# Altium PCB Control_CPUBoard_PCB.PcbDoc (part 1 of 2)
Units mm, origin at the board's own origin, x right, y up, seen from the top; angles counter-clockwise.
Board outline 140 x 120 mm, 2 copper layers (Top Layer, Bottom Layer); 146 components, 135 nets, 512 pads, 156 vias.
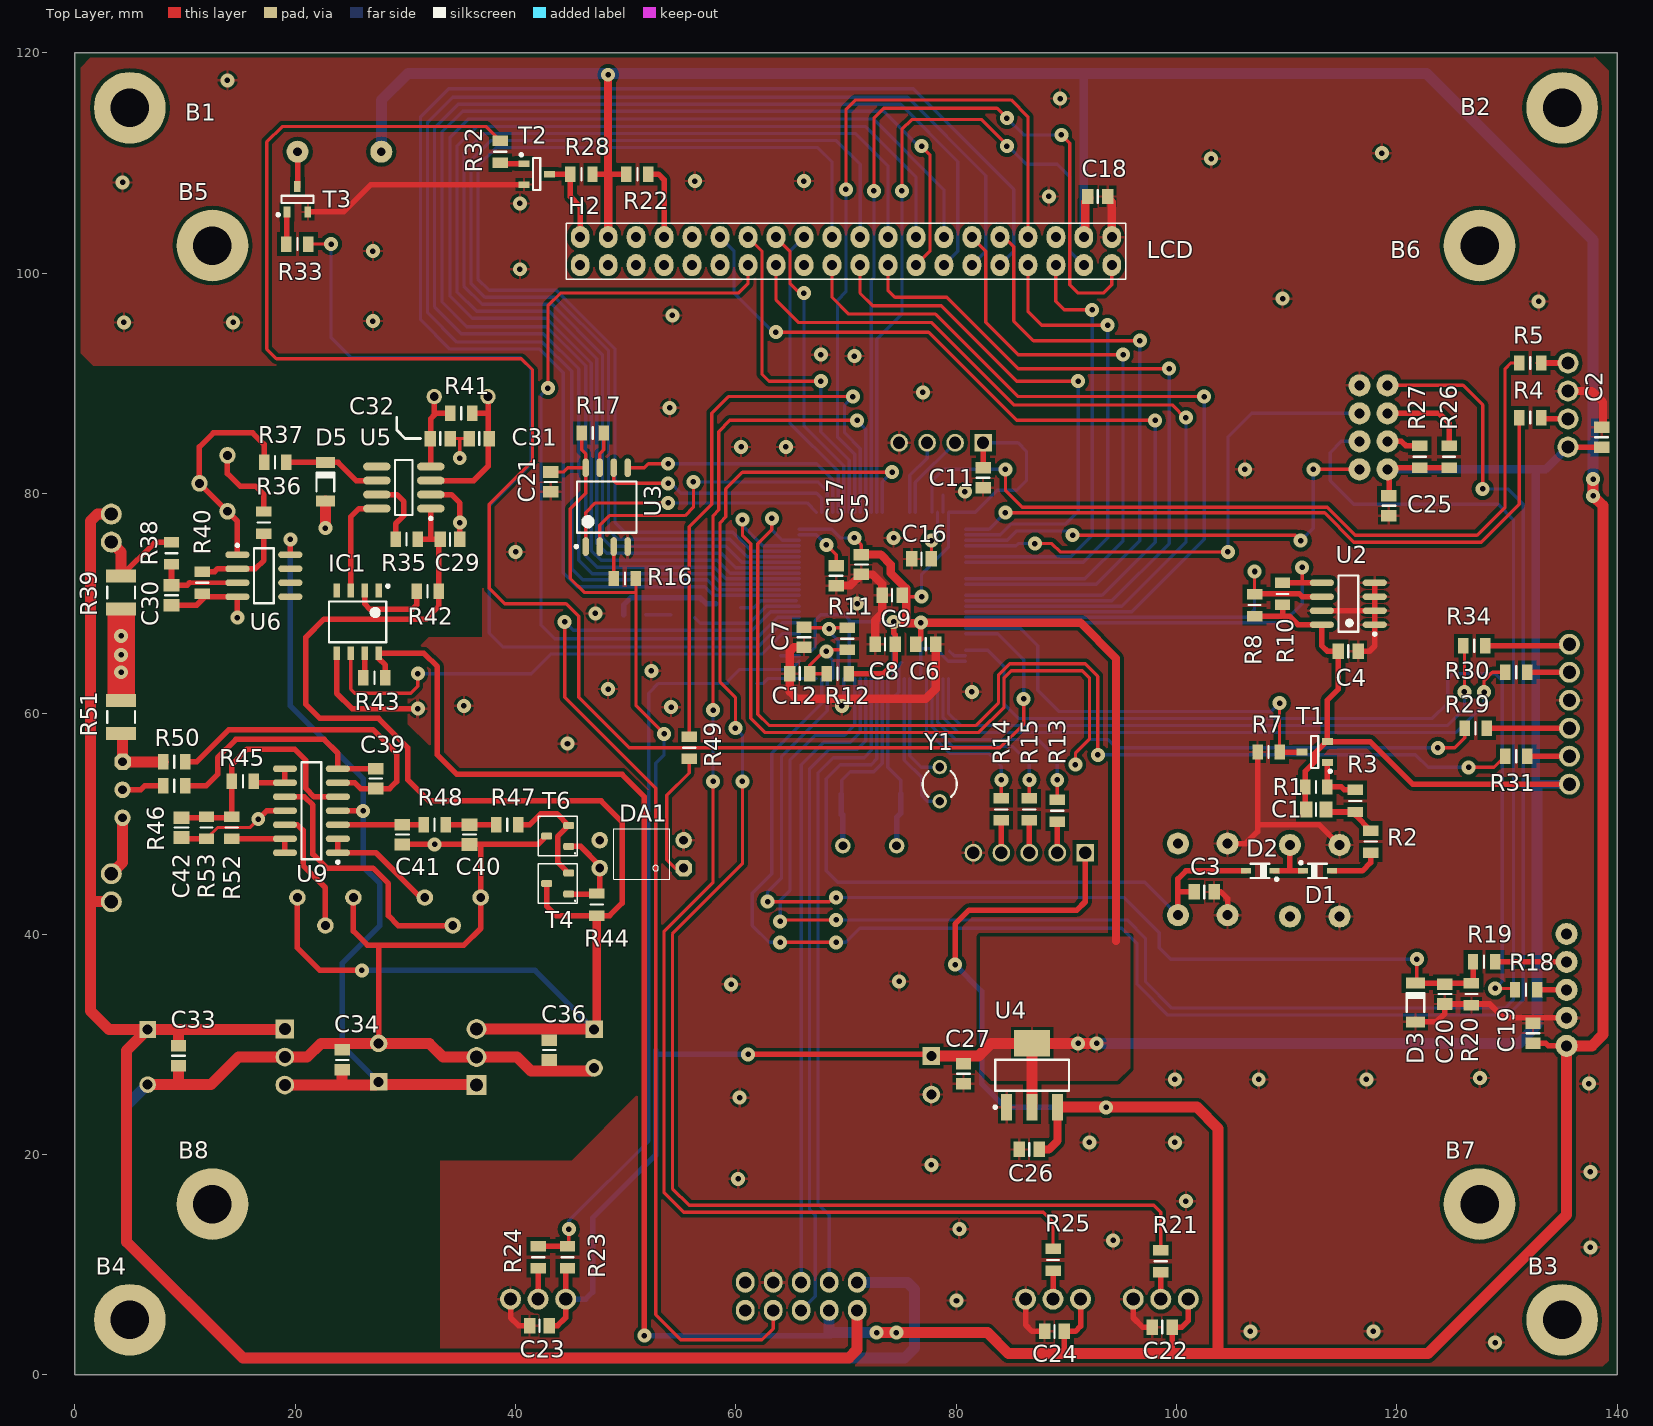
[diagram p0: Top Layer view]
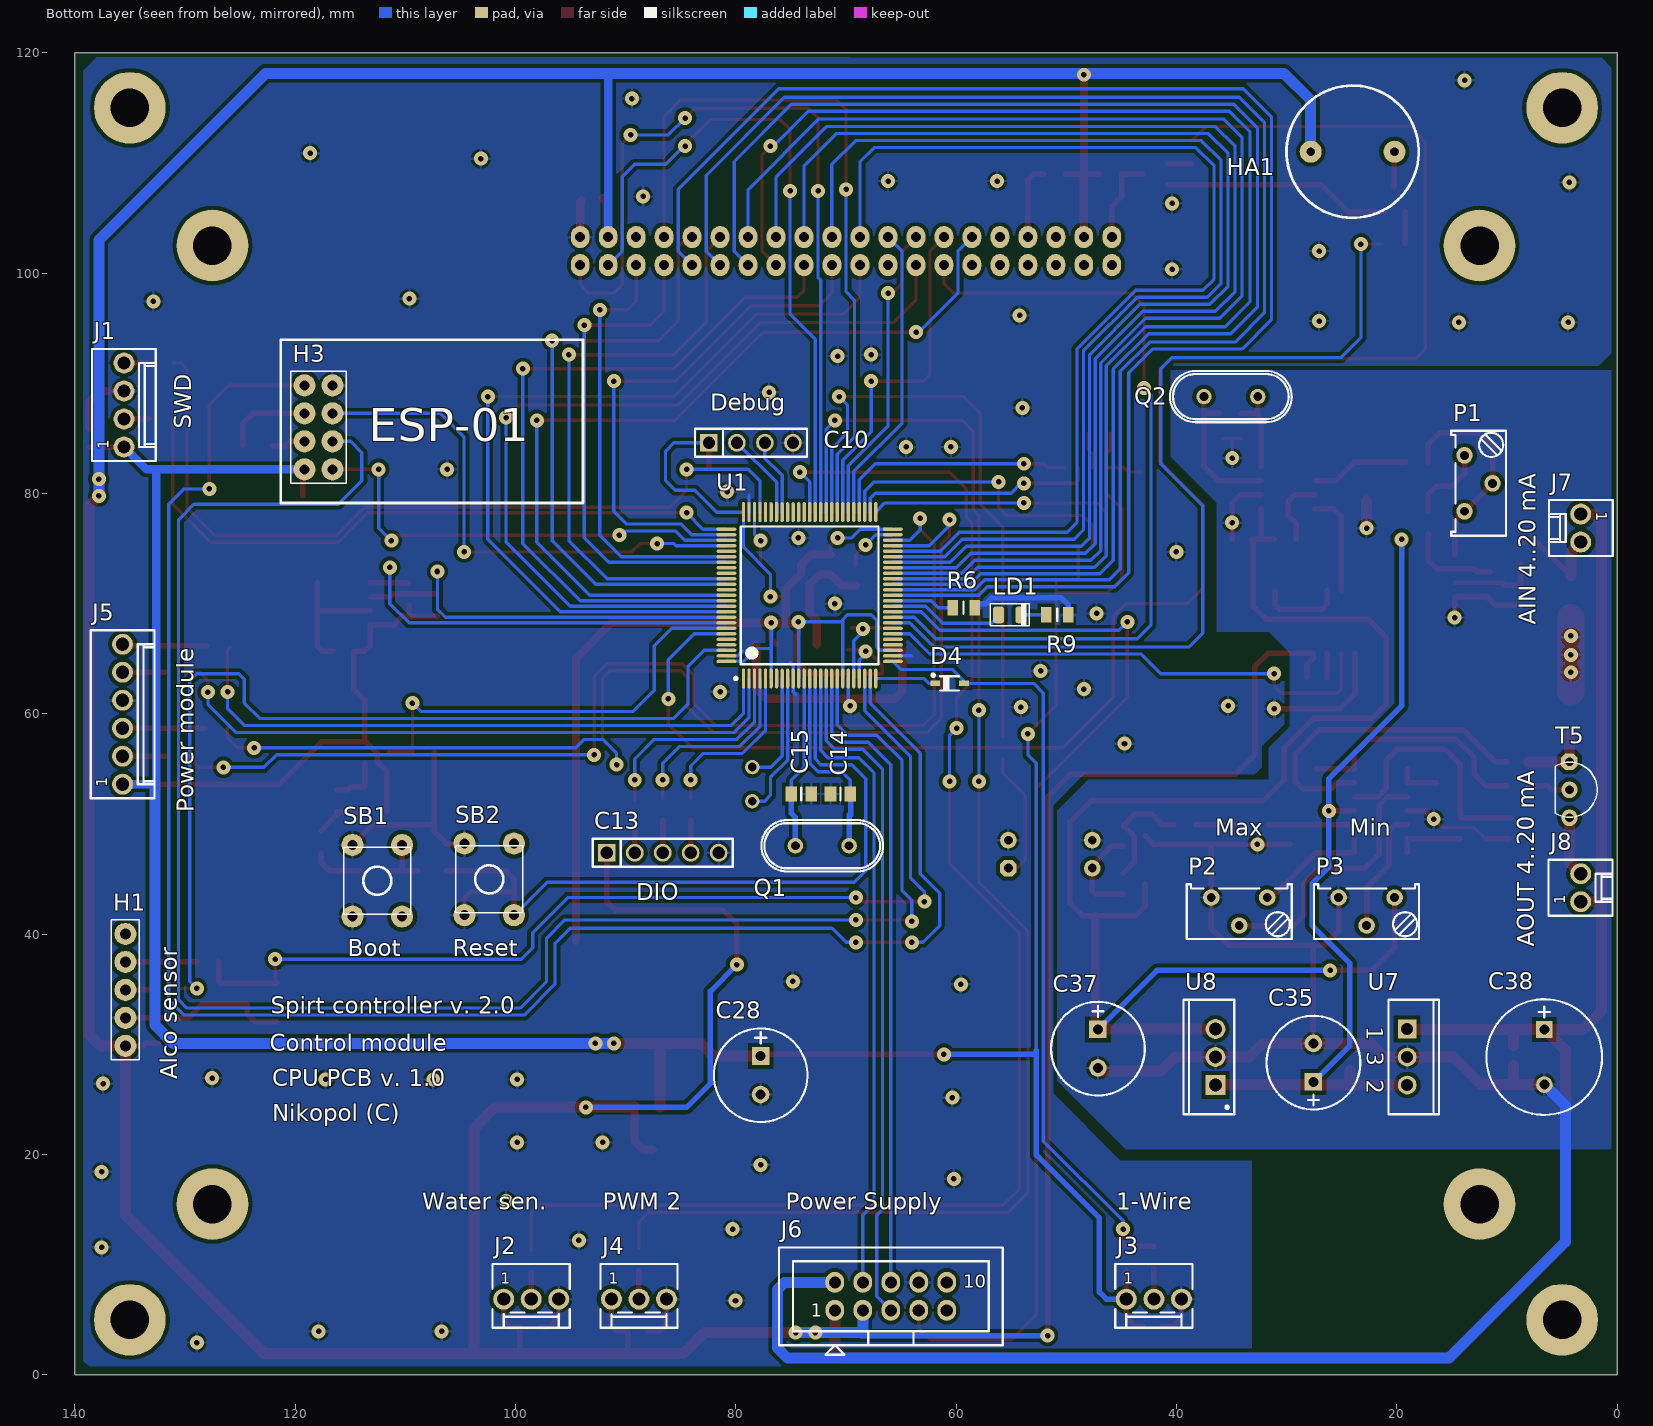
[diagram p1: Bottom Layer view, seen from below]
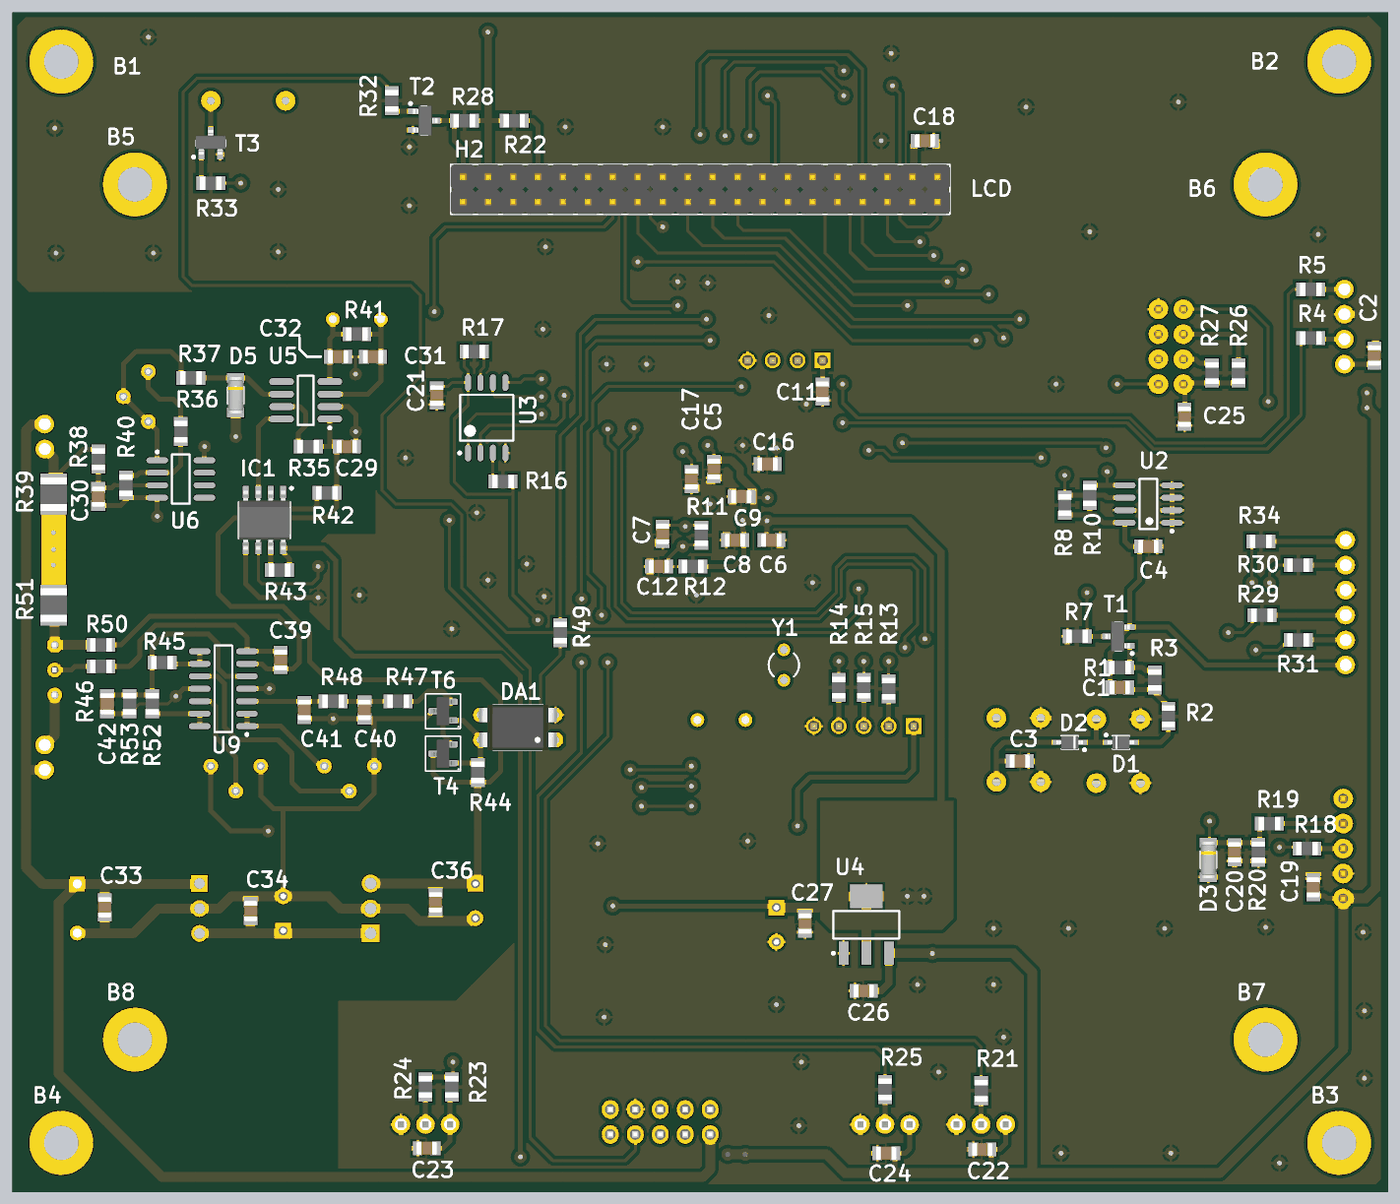
[diagram p3: 3D render of the assembled board from above, using the file's embedded part models]
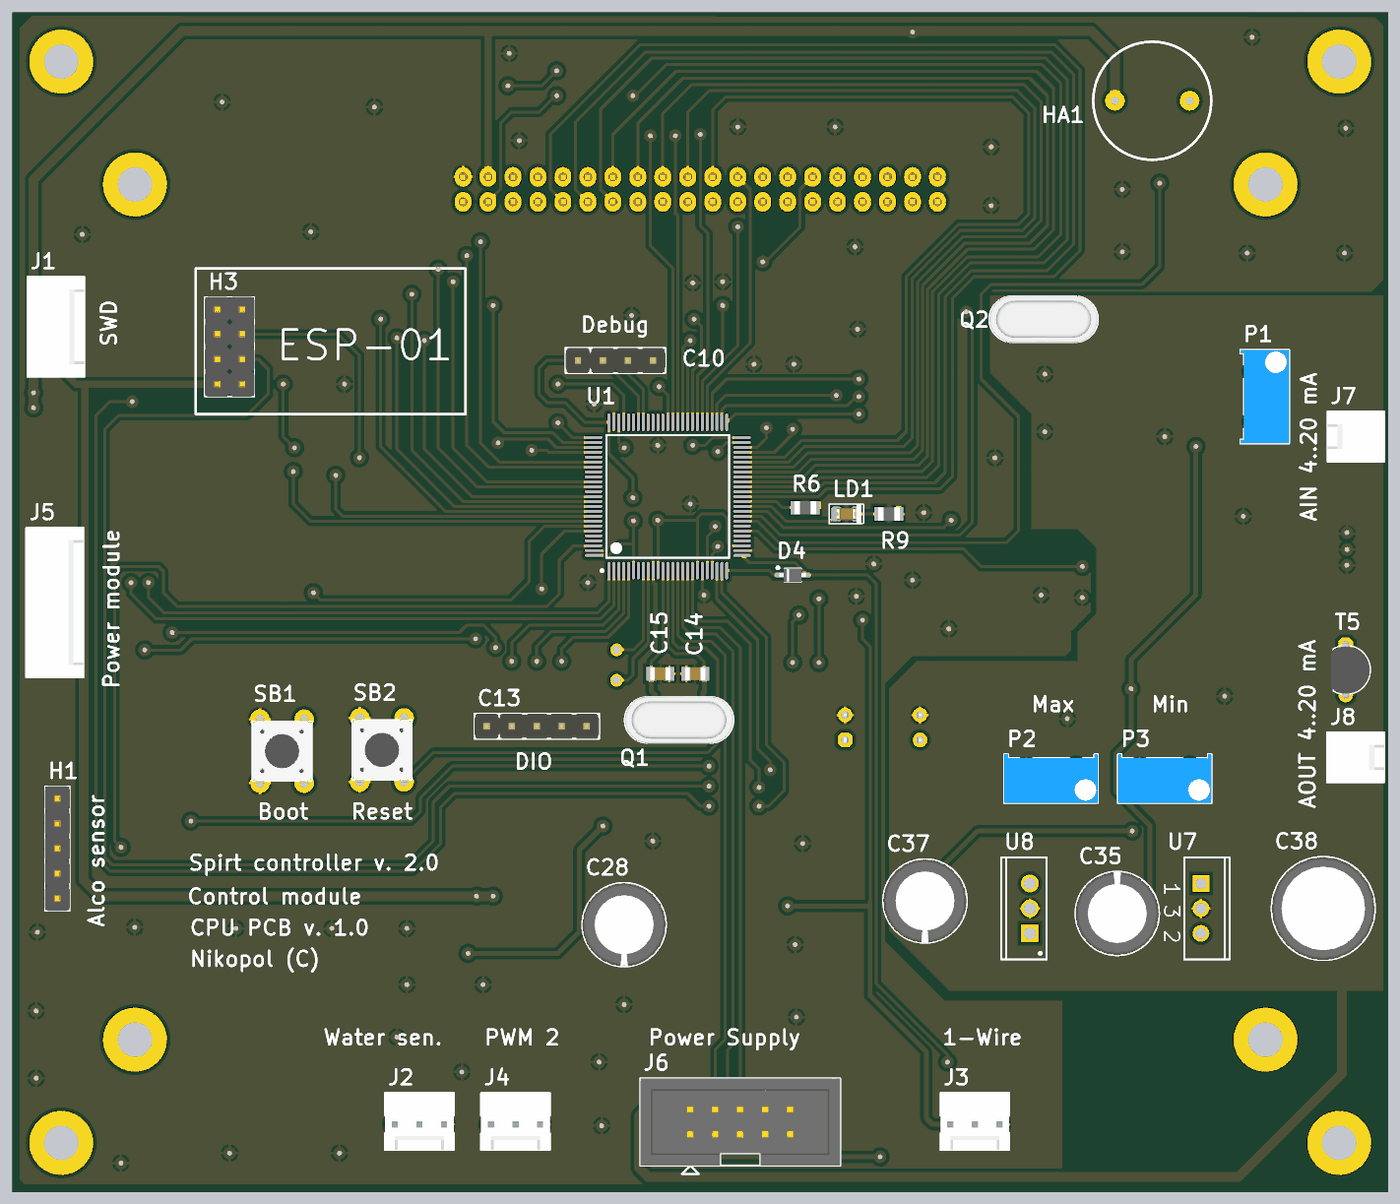
[diagram p4: 3D render of the assembled board from below, using the file's embedded part models]

## Layer stack, top to bottom
Top Solder: solder mask 0.0102, Solder Resist, Dk 3.5
Top Layer: signal copper 0.0356
Dielectric 1: dielectric 0.32, FR-4, Dk 4.8
Bottom Layer: signal copper 0.0356
Bottom Solder: solder mask 0.0102, Solder Resist, Dk 3.5

## Board outline
0,0 140,0 140,120 0,120

## Design rules (kind name [scope] priority, off if disabled: settings)
Clearance Clearance_1 [(InNamedPolygon('Bottom Layer- GND')) or (InNamedPolygon('Top Layer- GND'))] p1: gap=0.35
Clearance Clearance_2 [(InNamedPolygon('Bottom Layer- GND2'))] p2: gap=0.35
Clearance [All] p3: gap=0.125
HoleSize [All] p1: absolutevalues=TRUE maxlimit=10 minlimit=0.025 maxpercent=80.000 minpercent=20.000
PolygonConnect [All] p1: connectstyle=Relief reliefconductorwidth=0.254 reliefentries=4 polygonreliefangle="90 Angle" airgapwidth=0.254
RoutingVias [All] p1: holewidth=0.5 width=1.27 viastyle="Through Hole" minholewidth=0.5 minwidth=1.27 maxholewidth=0.711 maxwidth=2
SilkToSilkClearance [All] p1: silktosilkclearance=0.05
SilkToSolderMaskClearance [IsPad] p1: minsilkscreentomaskgap=0 clearancetoexposedcopper=TRUE
SolderMaskExpansion [All] p1: expansion=0.102
UnpouredPolygon [All] p1: allowunpoured=FALSE
Width [All] p1: maxlimit=5 minlimit=0.254 preferedwidth=0.5
26 further rules are at their usual default settings.

## Classes and differential pairs
component class CPUBoard_p1: C1 C2 C3 C4 C5 C6 C7 C8 C9 C10 C11 C12 C13 C14 C15 C16 C17 D1 D2 J1 LD1 Q1 R1 R2 R3 R4 R5 R6 R7 R8 R9 R10 R11 R12 R13 R14 R15 SB1 SB2 T1 U1 U2 Y1
component class CPUBoard_p2: B1 B2 B3 B4 B5 B6 B7 B8 C18 C19 C20 C21 C22 C23 C24 C25 C26 C27 C28 D3 D4 H1 H2 H3 HA1 J2 J3 J4 J5 J6 R16 R17 R18 R19 R20 R21 R22 R23 R24 R25 R26 R27 R28 R29 R30 R31 R32 R33 R34 T2 T3 U3 U4
component class CPUBoard_p3: C29 C30 C31 C32 C33 C34 C35 C36 C37 C38 C39 C40 C41 C42 D5 DA1 IC1 J7 J8 P1 P2 P3 Q2 R35 R36 R37 R38 R39 R40 R41 R42 R43 R44 R45 R46 R47 R48 R49 R50 R51 R52 R53 T4 T5 T6 U5 U6 U7 U8 U9

## Components (designator, comment, footprint, x,y, rotation, side; value= is the part's Value field where it differs from the comment)
B1 "Plated Hole" MTG350_650 5,115 r0 top
B2 "Plated Hole" MTG350_650 135,115 r0 top
B3 "Plated Hole" MTG350_650 135,5 r0 top
B4 "Plated Hole" MTG350_650 5,5 r0 top
B5 "Plated Hole" MTG350_650 12.5,102.5 r0 top
B6 "Plated Hole" MTG350_650 127.5,102.5 r0 top
B7 "Plated Hole" MTG350_650 127.5,15.5 r0 top
B8 "Plated Hole" MTG350_650 12.5,15.5 r0 top
C1 "1uF" CAPC2012X140N 112.668,51.327 r180 top
C2 "100nF" CAPC2012X135N 138.576,85.109 r270 top
C3 "100nF" CAPC2012X135N 102.508,43.834 r180 top
C4 "100nF" CAPC2012X135N 115.589,65.678 r180 top
C5 "100nF" CAPC2012X135N 71.393,73.552 r90 top
C6 "100nF" CAPC2012X135N 77.235,66.313 r180 top
C7 "100nF" CAPC2012X135N 66.186,66.948 r90 top
C8 "100nF" CAPC2012X135N 73.552,66.313 r0 top
C9 "100nF" CAPC2012X135N 74.187,70.758 r0 top
C10 "WE-2.54 mm Pin Header & Jumper 61300411121" 61300411121 82.442,84.601 r180 bottom
C11 "100nF" CAPC2012X135N 82.442,81.426 r90 top
C12 "100nF" CAPC2012X135N 65.805,63.646 r0 top
C13 "WE-2.54 mm Pin Header & Jumper 61300511121" 61300511121 91.713,47.39 r180 bottom
C14 "22pF" CAPC2012X135N 70.504,52.724 r180 bottom
C15 "22pF" CAPC2012X135N 74.06,52.724 r0 bottom
C16 "100nF" CAPC2012X135N 76.854,74.06 r0 top
C17 "100nF" CAPC2012X135N 69.107,72.536 r90 top
C18 "100nF" CAPC2012X135N 92.856,106.953 r0 top
C19 "100nF" CAPC2012X135N 132.353,31.007 r90 top
C20 "10nF" CAPC2012X135N 124.352,34.563 r90 top
C21 "100nF" CAPC2012X135N 43.199,81.045 r270 top
C22 "100nF" CAPC2012X135N 98.698,4.337 r180 top
C23 "100nF" CAPC2012X135N 42.183,4.464 r180 top
C24 "100nF" CAPC2012X135N 88.919,3.956 r180 top
C25 "100nF" CAPC2012X135N 119.272,78.886 r270 top
C26 "100nF" CAPC2012X135N 86.633,20.466 r180 top
C27 "100nF" CAPC2012X135N 80.664,27.324 r270 top
C28 "220uF" CAPPR350-850X1300 77.743,27.197 r270 bottom
C29 "100nF" CAPC2012X135N 34.055,75.838 r0 top
C30 "470nF" CAPC2012X110N 8.782,70.758 r90 top
C31 "33pF" CAPC2012X135N 36.722,84.982 r0 top
C32 "33pF" CAPC2012X135N 33.166,84.982 r180 top
C33 "100nF" CAPC2012X135N 9.417,28.975 r270 top
C34 "100nF" CAPC2012X135N 24.276,28.594 r90 top
C35 "220uF" CAPPR350-850X1300 27.578,28.34 r90 bottom
C36 "100nF" CAPC2012X135N 43.072,29.483 r270 top
C37 "220uF" CAPPR350-850X1300 47.136,29.61 r270 bottom
C38 "100uF" CAPPR500-1050X1750 6.623,28.848 r270 bottom
C39 "4.7nF" CAPC2012X135N 27.324,54.121 r90 top
C40 "560nF" CAPC2012X110N 35.833,49.041 r90 top
C41 "100nF" CAPC2012X135N 29.737,49.041 r270 top
C42 "47nF" CAPC2013X100N 9.671,49.676 r90 top
D1 "BAS416" SOD2512X110N 112.795,45.739 r0 top
D2 "BAS416" SOD2512X110N 107.588,45.739 r180 top
D3 "BZV55-B3V6" DIOMELF3515N 121.685,33.801 r270 top
D4 "BAS416" SOD2512X110N 60.598,62.757 r180 bottom
D5 "BZV55-B2V7" DIOMELF3515N 22.752,81.045 r270 top
DA1 "LTV817" DIL4-300a 51.454,47.263 r90 top
H1 "H-1x5" J1x5 135.401,34.944 r90 bottom
H2 "H-2x20" J2x20 70,102 r180 top
H3 "H-2x4" J2x4 117.748,85.871 r270 bottom
HA1 "HCM1205X" HCM1205X 24.022,111.017 r180 bottom
IC1 "HCPL-0601-000E" SOIC127P600X330-8N 25.673,68.345 r270 top
J1 "KK®" MOLEX_22-27-2041 135.528,88.03 r90 bottom
J2 "KK®" MOLEX_22-04-1031 98.571,6.877 r180 bottom
J3 "KK®" MOLEX_22-04-1031 42.056,6.877 r180 bottom
J4 "KK®" MOLEX_22-04-1031 88.792,6.877 r180 bottom
J5 "KK®" MOLEX_22-27-2061 135.655,59.963 r90 bottom
J6 "C-Grid®" MOLEX_70246-1004 65.932,7.131 r180 bottom
J7 "KK®" MOLEX_22-27-2021 3.321,76.854 r270 bottom
J8 "KK®" MOLEX_22-27-2021 3.321,44.215 r90 bottom
LD1 "Led" "Led 0805-Red" 55.137,68.98 r180 bottom
P1 "50k" TRIM_BOURNS_3296Y 12.592,80.918 r270 bottom
P2 "10k" TRIM_BOURNS_3296Y 34.309,42.056 r0 bottom
P3 "10k" TRIM_BOURNS_3296Y 22.752,42.056 r0 bottom
Q1 "8MHz" XTAL_HC-49/U-S 72.155,48.025 r0 bottom
Q2 "2MHz" XTAL_HC-49/U-S 35.071,88.792 r180 bottom
R1 "47k" RESC2012X60N 112.668,53.359 r180 top
R2 "100" RESC2012X60N 117.621,48.406 r90 top
R3 "47k" RESC2012X60N 116.224,52.089 r90 top
R4 "22" RESC2012X60N 132.099,86.887 r0 top
R5 "22" RESC2012X60N 132.099,91.84 r0 top
R6 "0" RESC2012X60N 59.328,69.615 r180 bottom
R7 "4k7" RESC2012X60N 108.35,56.534 r0 top
R8 "4k7" RESC2012X60N 107.08,69.869 r270 top
R9 "5k6" RESC2012X60N 50.819,68.98 r0 bottom
R10 "4k7" RESC2012X60N 109.62,70.885 r270 top
R11 "0" RESC2012X60N 70.123,66.821 r270 top
R12 "0" RESC2012X60N 69.234,63.646 r0 top
R13 "22" RESC2012X60N 89.173,51.2 r90 top
R14 "22" RESC2012X60N 84.093,51.327 r90 top
R15 "22" RESC2012X60N 86.633,51.327 r90 top
R16 "4k7" RESC2012X60N 49.93,72.282 r0 top
R17 "4k7" RESC2012X60N 47.009,85.49 r180 top
R18 "220" RESC2012X60N 131.718,34.944 r0 top
R19 "1k2" RESC2012X60N 127.908,37.484 r0 top
R20 "2k32" RESC2012X60N 126.765,34.563 r90 top
R21 "220" RESC2012X60N 98.571,10.306 r270 top
R22 "10k" RESC2012X60N 51.073,108.985 r0 top
R23 "4k7" RESC2012X60N 44.723,10.687 r270 top
R24 "220" RESC2012X60N 42.056,10.687 r270 top
R25 "220" RESC2012X60N 88.792,10.433 r270 top
R26 "4k7" RESC2012X60N 124.733,83.331 r270 top
R27 "4k7" RESC2012X60N 122.066,83.331 r270 top
R28 "100k" RESC2012X60N 45.993,108.985 r0 top
R29 "22" RESC2012X60N 130.829,56.153 r0 top
R30 "22" RESC2012X60N 130.829,63.773 r0 top
R31 "22" RESC2012X60N 127.146,58.693 r0 top
R32 "10k" RESC2012X60N 38.627,111.017 r270 top
R33 "10k" RESC2012X60N 20.212,102.635 r180 top
R34 "22" RESC2012X60N 127.019,66.186 r0 top
R35 "10k" RESC2012X60N 30.118,75.838 r0 top
R36 "1k3" RESC2012X60N 17.164,77.362 r270 top
R37 "100" RESC2012X60N 18.18,82.823 r0 top
R38 "5k6" RESC2012X60N 8.782,74.568 r270 top
R39 "1" RESC3225X70N 4.21,71.012 r90 top
R40 "120k" RESC2012X60N 11.576,71.901 r90 top
R41 "1M" RESC2012X60N 35.071,87.268 r180 top
R42 "470" RESC2012X60N 32.023,71.139 r0 top
R43 "10k" RESC2012X60N 27.197,63.265 r0 top
R44 "4k7" RESC2012X60N 47.39,42.691 r270 top
R45 "22k" RESC2012X60N 15.259,53.867 r180 top
R46 "22k" RESC2012X60N 9.036,53.486 r180 top
R47 "13k" RESC2012X60N 39.262,49.93 r180 top
R48 "1k" RESC2012X60N 32.658,49.93 r180 top
R49 "220" RESC2012X60N 55.772,56.915 r270 top
R50 "1k" RESC2012X60N 9.036,55.645 r180 top
R51 "100" RESC3225X70N 4.21,59.709 r270 top
R52 "22k" RESC2012X60N 14.243,49.676 r90 top
R53 "2k2" RESC2012X60N 11.957,49.676 r90 top
SB1 "TS-06" TS-06 112.541,44.85 r180 bottom
SB2 "TS-06" TS-06 102.381,44.977 r180 bottom
T1 "BC857B" SOT95P230X110-3N 112.541,56.534 r180 top
T2 "BC847B" SOT95P230X110-3N 41.929,108.985 r0 top
T3 "BC847B" SOT95P230X110-3N 20.212,106.699 r90 top
T4 "BC817-16" SOT23 43.834,44.596 r90 top
T5 "2N5551" TO92C1 4.337,53.105 r270 bottom
T6 "BC857A" SOT23 43.834,48.914 r90 top
U1 "STM32F407VGT6" STM-LQFP100_N 73.298,70.758 r90 bottom
U2 "AT24C08BN-SP25-B" 8S1_N 115.589,69.996 r180 top
U3 "SST25VF016B-75-4I-S2AF" MCHP-SOIC-S2A8_N 48.279,78.759 r90 top
U4 "LD1117AS12TR" SOT-223_N 86.887,27.197 r90 top
U5 "AD7741-ARZ" "SOIC8 8S1_M" 29.864,80.537 r180 top
U6 "LM358AD" SO8_N 17.164,72.536 r0 top
U7 "L7812ACV" TO220ABN 19.069,28.848 r270 bottom
U8 "L7805ACP" TO220FP 36.468,28.848 r90 bottom
U9 "LM324AD" SO14_N 21.482,51.2 r180 top
Y1 "XTAL" R38 78.505,53.613 r180 top

## Footprints (in the part's own frame and the unit in brackets; to place one, negate y for a bottom-side part, rotate by r counter-clockwise, add the part's x,y. Pads: shape width x height; smd on the part's side, far side on the other; paste and mask are expansions set on the pad)
8S1_N [mm] "SOIC, 8-Leads, Body 4.9x3.9mm, Pitch 1.27mm, IPC Medium Density"
  oval 2.2x0.6 smd: 1(-2.4,1.905) 2(-2.4,0.635) 3(-2.4,-0.635) 4(-2.4,-1.905) 5(2.4,-1.905) 6(2.4,-0.635) 7(2.4,0.635) 8(2.4,1.905)
  silkscreen extent -2.53,-2.55 0.9,2.88, body extent -1.99,-2.52 1.99,2.52, height 1.75
61300411121 [mm] "4 pins, 1 row, straight, gold plating"
  rect 1.6x1.6 hole 1.1: 1(0,0)
  round 1.6 hole 1.1: 2(2.54,0) 3(5.08,0) 4(7.62,0)
  silkscreen extent -1.27,-1.27 8.89,1.27, body extent -1.27,-1.27 8.89,1.27, height 8.54
61300511121 [mm] "5 pins, 1 row, straight, gold plating"
  rect 1.6x1.6 hole 1.1: 1(0,0)
  round 1.6 hole 1.1: 2(2.54,0) 3(5.08,0) 4(7.62,0) 5(10.16,0)
  silkscreen extent -1.27,-1.27 11.43,1.27, body extent -1.27,-1.27 11.43,1.27, height 8.54
CAPC2012X110N [mm] "Chip Capacitor, Body 2.0x1.25mm, IPC Medium Density"
  rect 1.15x1.45 smd: 1(-0.9,0) 2(0.9,0)
  silkscreen extent 0,-0.58 0,0.58, body extent -1.05,-0.67 1.05,0.68, height 1.1
CAPC2012X135N [mm] "Chip Capacitor, Body 2.0x1.25mm, IPC Medium Density"
  rect 1.05x1.4 smd: 1(-0.9,0) 2(0.9,0)
  silkscreen extent 0,-0.58 0,0.58, body extent -1.05,-0.67 1.05,0.68, height 1.25
CAPC2012X140N [mm] "Chip Capacitor, Body 2.0x1.25mm, IPC Medium Density"
  rect 1.15x1.45 smd: 1(-0.9,0) 2(0.9,0)
  silkscreen extent 0,-0.58 0,0.58, body extent -1.05,-0.67 1.05,0.68, height 1.3
CAPC2013X100N [mm] "Capacitor, Non-Polarized, Chip; 2.00mm L X 1.25mm W X 0.9mm H, IPC Medium Density"
  rect 1.15x1.45 smd: 1(-0.9,0) 2(0.9,0)
  silkscreen extent 0,-0.63 0,0.63, body extent -1.1,-0.72 1.1,0.73, height 1
CAPPR350-850X1300 [mm] "Capacitor, Radial, Pin spacing 3.5mm - Body Diameter 8.5mm x Body Height 13mm"
  rect 1.6x1.6 hole 0.9: 1(-1.75,0)
  round 1.6 hole 0.9: 2(1.75,0)
  silkscreen extent -4.25,-4.25 4.25,4.25, body extent -4.25,-4.25 4.25,4.25, height 13
CAPPR500-1050X1750 [mm] "Capacitor, Radial, Pin spacing 5.0mm - Body Diameter 10.5mm X Body Height 17.5mm"
  rect 1.5x1.5 hole 0.9: 1(-2.5,0)
  round 1.5 hole 0.9: 2(2.5,0)
  silkscreen extent -5.25,-5.25 5.25,5.25, body extent -5.25,-5.25 5.25,5.25, height 17.5
DIL4-300a [mm]
  oct 1.5x1.5 hole 0.8: 1(-1.27,-3.81)
  round 1.5 hole 0.8: 2(1.27,-3.81) 3(1.27,3.81) 4(-1.27,3.81)
  silkscreen extent -2.29,-2.54 2.29,2.54, body extent -2.29,-3.96 2.29,3.96, height 4.25
DIOMELF3515N [mm] "SOD80C, MELF Diode, 2-Leads, Body 3.5x1.5mm, IPC Medium Density"
  rect 1x1.75 smd: 1(-1.75,0) 2(1.75,0)
  silkscreen extent -0.85,-0.8 0.85,0.8, body extent -1.85,-0.8 1.85,0.8, height 1.6
HCM1205X [mm]
  round 2 hole 0.8: 1(-3.8,0) 2(3.8,0)
  silkscreen extent -6,-6 6,6, body extent -6,-6 6,6, height 10
J1x5 [mm]
  round 2 hole 1: 1(-5.08,0) 2(-2.54,0) 3(0,0) 4(2.54,0) 5(5.08,0)
  silkscreen extent -6.35,-1.27 6.35,1.27, body extent -6.35,-1.27 6.35,1.27, height 10.1
J2x4 [mm]
  round 2 hole 0.9: 1(-3.937,-1.397) 2(-3.937,1.143) 3(-1.397,-1.397) 4(-1.397,1.143) 5(1.143,-1.397) 6(1.143,1.143) 7(3.683,-1.397) 8(3.683,1.143)
  silkscreen extent -5.21,-2.67 4.95,2.41, body extent -5.21,-2.67 4.95,2.41, height 10.1
J2x20 [mm]
  oval 1.7x2 hole 0.9 mask+0.102: 1(-24.13,-1.27) 2(-24.13,1.27) 3(-21.59,-1.27) 4(-21.59,1.27) 5(-19.05,-1.27) 6(-19.05,1.27) 7(-16.51,-1.27) 8(-16.51,1.27) 9(-13.97,-1.27) 10(-13.97,1.27) 11(-11.43,-1.27) 12(-11.43,1.27) 13(-8.89,-1.27) 14(-8.89,1.27) 15(-6.35,-1.27) 16(-6.35,1.27) 17(-3.81,-1.27) 18(-3.81,1.27) 19(-1.27,-1.27) 20(-1.27,1.27) 21(1.27,-1.27) 22(1.27,1.27) 23(3.81,-1.27) 24(3.81,1.27) 25(6.35,-1.27) 26(6.35,1.27) 27(8.89,-1.27) 28(8.89,1.27) 29(11.43,-1.27) 30(11.43,1.27) 31(13.97,-1.27) 32(13.97,1.27) 33(16.51,-1.27) 34(16.51,1.27) 35(19.05,-1.27) 36(19.05,1.27) 37(21.59,-1.27) 38(21.59,1.27) 39(24.13,-1.27) 40(24.13,1.27)
  silkscreen extent -25.4,-2.54 25.4,2.54, body extent -25.4,-2.54 25.4,2.54, height 10.1
"Led 0805-Red" [mil]
  rrect50% 40x60 smd: 1(-40,0) 2(40,0)
  silkscreen extent -69,-40 69,40, body extent -40,-25 40,25, height 43
MCHP-SOIC-S2A8_N [mm] "SOIC, 8-Leads, Body 5.275x5.275mm, Pitch 1.27mm, IPC Medium Density"
  oval 1.7x0.6 smd: 1(-3.575,1.905) 2(-3.575,0.635) 3(-3.575,-0.635) 4(-3.575,-1.905) 5(3.575,-1.905) 6(3.575,-0.635) 7(3.575,0.635) 8(3.575,1.905)
  silkscreen extent -3.7,-2.7 2.33,2.88, body extent -2.7,-2.7 2.7,2.7, height 2.16
MOLEX_22-04-1031 [mm] "2.5mm (.100\") Pitch KK® Header, Single Row, Vertical, 3 Circuits"
  round 1.9 hole 1.2: 1(-2.5,0) 2(0,0) 3(2.5,0)
  silkscreen extent -3.5,-2.6 3.5,3.2, body extent -3.5,-2.6 3.5,3.2, height 11.7
MOLEX_22-27-2021 [mm] "2.54mm (.100\") Pitch KK® Header, Single Row, Vertical, 2 Circuits"
  round 1.9 hole 1.2: 1(-1.27,0.002) 2(1.27,-0.002)
  silkscreen extent -2.54,-2.88 2.54,2.92, body extent -2.54,-2.88 2.54,2.92, height 11.7
MOLEX_22-27-2041 [mm] "2.54mm (.100\") Pitch KK® Header, Single Row, Vertical, 4 Circuits"
  round 1.9 hole 1.2: 1(-3.81,0) 2(-1.27,0) 3(1.27,0) 4(3.81,0)
  silkscreen extent -5.08,-2.88 5.08,2.92, body extent -5.08,-2.88 5.08,2.92, height 11.7
MOLEX_22-27-2061 [mm] "2.54mm (.100\") Pitch KK® Header, Single Row, Vertical, 6 Circuits"
  round 1.9 hole 1.2: 1(-6.35,0) 2(-3.81,0) 3(-1.27,0) 4(1.27,0) 5(3.81,0) 6(6.35,0)
  silkscreen extent -7.62,-2.9 7.62,2.9, body extent -7.62,-2.9 7.62,2.9, height 11.7
MOLEX_70246-1004 [mm] "2.54mm Pitch C-Grid® Header, Low Profile, Dual Row, Vertical, Shrouded Header"
  oval 1.7x1.9 hole 1.1: 1(-5.08,-1.27) 2(-5.08,1.27) 3(-2.54,-1.27) 4(-2.54,1.27) 5(0,-1.27) 6(0,1.27) 7(2.54,-1.27) 8(2.54,1.27) 9(5.08,-1.27) 10(5.08,1.27)
  silkscreen extent -10.16,-5.31 10.16,4.45, body extent -10.16,-4.44 10.16,4.45, height 9.27
MTG350_650 [mm] "Plated Through Hole: Hole Dia.=3.5mm Pad Dia.=6.5mm"
  round 6.5 hole 3.5: 1(0,0)
R38 [mm] "Crystal, Thru-Hole; 2 Leads; Body 3.1 x 8.2 mm (Dia.xH)"
  round 1.3 hole 0.8: 1(0,1.55) 2(0,-1.55)
  silkscreen extent -1.55,-1.19 1.55,1.17
RESC2012X60N [mm] "Chip Resistor, EIA 0805, Metric 2012, Body 2.0x1.2mm, IPC Medium Density"
  rect 0.95x1.4 smd: 1(-1,0) 2(1,0)
  silkscreen extent 0,-0.55 0,0.55, body extent -1.1,-0.67 1.1,0.68, height 0.6
RESC3225X70N [mm] "Chip Resistor, EIA 1210, Metric 3225, Body 3.2x2.5mm, IPC Medium Density"
  rect 1.15x2.7 smd: 1(-1.5,0) 2(1.5,0)
  silkscreen extent -0.55,-1.25 0.55,1.25, body extent -1.7,-1.35 1.7,1.35, height 0.7
SO8_N [mm] "SOIC, 8-Leads, Body 4.9x3.9mm, Pitch 1.27mm, IPC Medium Density"
  oval 2.2x0.6 smd: 1(-2.4,1.905) 2(-2.4,0.635) 3(-2.4,-0.635) 4(-2.4,-1.905) 5(2.4,-1.905) 6(2.4,-0.635) 7(2.4,0.635) 8(2.4,1.905)
  silkscreen extent -2.52,-2.5 0.9,2.88, body extent -1.95,-2.45 1.95,2.45, height 1.75
SO14_N [mm] "SOIC, 14-Leads, Body 8.7x3.9mm, Pitch 1.27mm, IPC Medium Density"
  oval 2.2x0.6 smd: 1(-2.4,3.81) 2(-2.4,2.54) 3(-2.4,1.27) 4(-2.4,0) 5(-2.4,-1.27) 6(-2.4,-2.54) 7(-2.4,-3.81) 8(2.4,-3.81) 9(2.4,-2.54) 10(2.4,-1.27) 11(2.4,0) 12(2.4,1.27) 13(2.4,2.54) 14(2.4,3.81)
  silkscreen extent -2.53,-4.4 0.9,4.78, body extent -1.95,-4.33 1.95,4.33, height 1.75
SOD2512X110N [mm] "Small Outline Diode Flat Lead (SOD-323), 1.70mm W X 1.25mm L X 1.10mm H body,  IPC Medium Density"
  rect 0.9x0.5 smd: 1(-1.3,0) 2(1.3,0)
  silkscreen extent -1.62,-0.65 0.85,0.87, body extent -1.35,-0.67 1.35,0.68, height 1.1
"SOIC8 8S1_M" [mm] "SOIC, 8-Leads, Body 4.9x3.9mm, Pitch 1.27mm, IPC Low Density"
  oval 2.5x0.7 smd: 1(-2.45,1.905) 2(-2.45,0.635) 3(-2.45,-0.635) 4(-2.45,-1.905) 5(2.45,-1.905) 6(2.45,-0.635) 7(2.45,0.635) 8(2.45,1.905)
  silkscreen extent -2.58,-2.5 0.8,2.93, body extent -2,-2.5 2,2.5, height 1.75
SOIC127P600X330-8N [mm] "SOIC, 1.27mm pitch;8  pin, 4.00mm W X 5.00mm L, IPC Medium Density"
  rect 1.25x0.6 smd: 1(-2.85,1.905) 2(-2.85,0.635) 3(-2.85,-0.635) 4(-2.85,-1.905) 5(2.85,-1.905) 6(2.85,-0.635) 7(2.85,0.635) 8(2.85,1.905)
  silkscreen extent -3.37,-2.6 1.85,2.88, body extent -3,-2.6 3,2.6, height 3.3
SOT23 [mm] "SOT-23; 3 Leads; Body 3.0 x 2.6 mm Pitch 0.95mm"
  rrect50% 0.65x1 smd: 1(-0.95,-1) 2(0.95,-1) 3(0,1)
  silkscreen extent -1.78,-1.78 1.78,1.78, body extent -1.46,-1.23 1.46,1.24, height 1
SOT95P230X110-3N [mm] "SOT23, 3 pin, Pitch 0.95mm - 1.3mm W X 2.9mm L X 1.1mm H, IPC Medium Density"
  rect 1x0.6 smd: 1(-1.15,0.95) 2(-1.15,-0.95) 3(1.15,0)
  silkscreen extent -1.53,-1.45 0.33,1.87, body extent -1.17,-1.5 1.33,1.5, height 1.1
SOT-223_N [mm] "SOT223, 4-Leads, Body 6.5x3.5mm, Pitch 2.3mm, Lead Span 7mm, IPC Medium Density"
  rect 2.4x1 smd: 1(-2.9,2.3) 2(-2.9,0) 3(-2.9,-2.3)
  rect 2.4x3.3 smd: 4(2.9,0)
  silkscreen extent -3.02,-3.35 1.4,3.47, body extent -1.85,-3.35 1.85,3.35, height 1.8
STM-LQFP100_N [mm] "Thin QFP, 100-Leads, Body 14x14mm, Pitch 0.5mm, IPC Medium Density"
  oval 1.8x0.3 smd: 1(-7.55,6) 2(-7.55,5.5) 3(-7.55,5) 4(-7.55,4.5) 5(-7.55,4) 6(-7.55,3.5) 7(-7.55,3) 8(-7.55,2.5) 9(-7.55,2) 10(-7.55,1.5) 11(-7.55,1) 12(-7.55,0.5) 13(-7.55,0) 14(-7.55,-0.5) 15(-7.55,-1) 16(-7.55,-1.5) 17(-7.55,-2) 18(-7.55,-2.5) 19(-7.55,-3) 20(-7.55,-3.5) 21(-7.55,-4) 22(-7.55,-4.5) 23(-7.55,-5) 24(-7.55,-5.5) 25(-7.55,-6) 51(7.55,-6) 52(7.55,-5.5) 53(7.55,-5) 54(7.55,-4.5) 55(7.55,-4) 56(7.55,-3.5) 57(7.55,-3) 58(7.55,-2.5) 59(7.55,-2) 60(7.55,-1.5) 61(7.55,-1) 62(7.55,-0.5) 63(7.55,0) 64(7.55,0.5) 65(7.55,1) 66(7.55,1.5) 67(7.55,2) 68(7.55,2.5) 69(7.55,3) 70(7.55,3.5) 71(7.55,4) 72(7.55,4.5) 73(7.55,5) 74(7.55,5.5) 75(7.55,6)
  oval 0.3x1.8 smd: 26(-6,-7.55) 27(-5.5,-7.55) 28(-5,-7.55) 29(-4.5,-7.55) 30(-4,-7.55) 31(-3.5,-7.55) 32(-3,-7.55) 33(-2.5,-7.55) 34(-2,-7.55) 35(-1.5,-7.55) 36(-1,-7.55) 37(-0.5,-7.55) 38(0,-7.55) 39(0.5,-7.55) 40(1,-7.55) 41(1.5,-7.55) 42(2,-7.55) 43(2.5,-7.55) 44(3,-7.55) 45(3.5,-7.55) 46(4,-7.55) 47(4.5,-7.55) 48(5,-7.55) 49(5.5,-7.55) 50(6,-7.55) 76(6,7.55) 77(5.5,7.55) 78(5,7.55) 79(4.5,7.55) 80(4,7.55) 81(3.5,7.55) 82(3,7.55) 83(2.5,7.55) 84(2,7.55) 85(1.5,7.55) 86(1,7.55) 87(0.5,7.55) 88(0,7.55) 89(-0.5,7.55) 90(-1,7.55) 91(-1.5,7.55) 92(-2,7.55) 93(-2.5,7.55) 94(-3,7.55) 95(-3.5,7.55) 96(-4,7.55) 97(-4.5,7.55) 98(-5,7.55) 99(-5.5,7.55) 100(-6,7.55)
  silkscreen extent -7.67,-6.25 6.25,6.83, body extent -7,-7 7,7, height 1.6
TO92C1 [mm]
  round 1.5 hole 0.8: 1(2.54,0) 2(0,0)
  oct 1.5x1.5 hole 0.8: 3(-2.54,0)
  silkscreen extent -2.51,-1.27 2.49,2.51, body extent -2.79,-1.52 2.79,2.41, height 8
TO220ABN [mm] "TO, Thru-Hole, Vertical, Heatsink Mounted; 3 In-Line Leads; Pitch 2.54 mm; Pin sequence 1, 3, 2"
  rect 1.7x1.7 hole 1.1: 1(-2.54,0)
  round 1.7 hole 1.1: 2(2.54,0) 3(0,0)
  silkscreen extent -5.2,-1.7 5.2,2.9
TO220FP [mm] "TO, Thru-Hole, Vertical, Heatsink Mounted; 3 In-Line Leads; Pitch 2.54 mm"
  rect 1.8x1.8 hole 1.2: 1(-2.54,0)
  round 1.8 hole 1.2: 2(0,0) 3(2.54,0)
  silkscreen extent -5.2,-1.7 5.2,2.9, body extent -5.25,-1.75 5.25,2.95, height 20
TRIM_BOURNS_3296Y [mm] "Trimming Potentiometer BOURNS 3296Y Series"
  round 1.5 hole 0.8: 1(-2.54,-1.27) 2(0,1.27) 3(2.54,-1.27)
  silkscreen extent -4.77,-2.48 4.77,2.49, body extent -4.76,-2.47 4.77,2.49, height 11.49
TS-06 [mm]
  round 2 hole 0.9: 1(-2.25,-3.25) 1(-2.25,3.25) 2(2.25,-3.25) 2(2.25,3.25)
  silkscreen extent -3.05,-3.05 3.05,3.05, body extent -3,-3.3 3,3.3, height 3.95
XTAL_HC-49/U-S [mm] "HC-49/U-S Leaded Cristal, Body 11.5x4.66mm; Pitch 4.88mm"
  round 1.4 hole 0.8: 1(-2.44,0) 2(2.44,0)
  silkscreen extent -5.53,-2.33 5.53,2.33, body extent -5.52,-2.4 5.53,2.4, height 13.6

## Part data
B1 B2 B3 B4 B5 B6 B7 B8: library part PLATED_HOLE3.5_PAD6.5, "Single Terminal Socket"
C1: library part CC0805_1UF_35V_20%_X7R, "Non-polarised capacitor"
C2 C3 C4 C5 C6 C7 C8 C9 C11 C12 C16 C17 C18 C19 C21 C22 C23 C24 C25 C26 C27 C29 C33 C34 C36 C41: library part CC0805_100NF_50V_10%_X7R, "Non-polarised capacitor"
C10 C13: "WR-PHD 2.54mm Pin Header"
C14 C15: library part CC0805_22PF_50V_5%_NP0, "Non-polarised capacitor"
C20: library part CC0805_10NF_50V_5%_X7R, "Non-polarised capacitor"
C28 C35 C37: library part CAER_220UF_25V_20%_RUBYCON_25YXF220M8X11.5, "Polarised capacitor"
C30 C40: library part CC0805_470NF_50V_10%_X7R, "Non-polarised capacitor"
C31 C32: library part CC0805_33PF_50V_5%_NP0, "Non-polarised capacitor"
C38: library part CAER_100UF_63V_20%_500-1050X1750_LESR0R190, "Polarised capacitor"
C39: library part CC0805_4.7NF_50V_10%_X7R, "Non-polarised capacitor"
C42: library part CC0805_47NF_50V_10%_X7R, "Non-polarised capacitor"
D1 D2 D4: "Diode"
D3 D5: "Zener Diode"
IC1: "Single Optocoupler"
J1: library part MOLEX_22-27-2041, "Connector 4 Male"
J2 J3 J4: library part MOLEX_22-04-1031, "Connector 3 Male"
J5: library part MOLEX_22-27-2061, "Connector 6 Male"
J6: library part MOLEX_70246-1004, "Connector 10 Male"
J7 J8: library part MOLEX_22-27-2021, "Connector 2 Male"
LD1: library part "Led 0805 KP-2012EC", "Red  627nm 12mcd"
P1: library part TRIM_25T_50K_BOURNS_3296Y-1-503LF, "Trimming Potentiometer"
P2 P3: library part TRIM_25T_10K_BOURNS_3296Y-1-103LF, "Trimming Potentiometer"
Q1 Q2: library part XTAL_5MHZ_CITIZEN_HC49US5.000MABJ-UB, "Quartz Crystal"
R1 R3: library part R0805_47K_1%_0.125W_100PPM, "Resistor - 1%"
R2: library part R0805_100R_0.1%_0.1W_10PPM, "Resistor - 0.1%"
R4 R5 R13 R14 R15 R29 R30 R31 R34: library part R0805_22R_1%_0.125W_100PPM, "Resistor - 1%"
R6 R11 R12: library part R0805_0R_JUMPER, "Resistor"
R7 R8 R10 R16 R17 R23 R26 R27 R44: library part R0805_4K7_1%_0.125W_100PPM, "Resistor - 1%"
R9 R38: library part R0805_5K6_1%_0.125W_100PPM, "Resistor - 1%"
R18 R21 R24 R25 R49: library part R0805_220R_1%_0.125W_100PPM, "Resistor - 1%"
R19: library part R0805_1K2_1%_0.125W_100PPM, "Resistor - 1%"
R20: library part R0805_2K32_0.1%_0.1W_10PPM, "Resistor - 0.1%"
R22: library part R0805_10K_0.1%_0.1W_10PPM, "Resistor - 0.1%"
R28: library part R0805_100K_0.1%_0.1W_10PPM, "Resistor - 0.1%"
R32 R33 R35 R43: library part R0805_10K_1%_0.125W_100PPM, "Resistor - 1%"
R36: library part R0805_1K3_1%_0.125W_100PPM, "Resistor - 1%"
R37: library part R0805_100R_1%_0.125W_100PPM, "Resistor - 1%"
R39: library part R1210_51R_5%_0.5W_200PPM_PANASONIC_ERJP, "Resistor - 0,1%"
R40: library part R0805_120K_1%_0.125W_100PPM, "Resistor - 1%"
R41: library part R0805_1M_1%_0.125W_100PPM, "Resistor - 1%"
R42: library part R0805_470R_1%_0.125W_100PPM, "Resistor - 1%"
R45 R46 R52: library part R0805_22K_1%_0.125W_100PPM, "Resistor - 1%"
R47: library part R0805_13K_1%_0.125W_100PPM, "Resistor - 1%"
R48 R50: library part R0805_1K_1%_0.125W_100PPM, "Resistor - 1%"
R51: library part R1210_270R_5%_0.5W_200PPM_PANASONIC_ERJP, "Resistor - 0.1%"
R53: library part R0805_2K2_1%_0.125W_100PPM, "Resistor - 1%"
SB1 SB2: library part "Buton TS-06"
T1: "PNP Transistor"
T2 T3: "NPN Transistor"
T4 T6: "SMD-SOT23"
T5: "150V 0.5A 100MHz 6p (10V)"
U1: "ARM Cortex-M4 32-bit MCU+FPU, 210 DMIPS, 1024 kB Flash, 192 kB Internal RAM, 82 I/Os, 100-pin LQFP, -40 to 85 degC, Tray"
U2: "8Kbit (1024 x 8), 2-wire Bus Automotive Serial EEPROM with Write Protect, 2.5V, 8-Pin SOIC, Bulk"
U3: "16 Mbit SPI Serial Flash, 2.7 to 3.6 V, 80 MHz, -40 to 85 degC, 8-pin SOIC (S2A8), Tube"
U4: "1A, Low Drop Positive Voltage Regulator, 1.2V, 4-Pin SOT-223, Tape and Reel"
U6: "Low-Power Dual Operational Amplifier"
U7: "Precision 1A Regulator"
U8: "Positive Voltage Regulator, 5V, 3-Pin TO-220FP"
U9: "Low-Power Quad Operational Amplifier"
Y1: "Crystal Oscillator"

## Via types
v1: diameter 1.27, hole 0.5, Top Layer to Bottom Layer, tented both sides, 156 vias

## Nets (pads, with @x,y where several pads share a name; then routed paths per layer and width w, separated by ;. In a path a pad name is that pad's centre, name@x,y a point inside that pad or via, vN(x,y) a via of type N, cw(c..) or ccw(c..) an arc to the next point about the centre after c; other vN are vias at no path point)
+3V3: C1.2 C2.2 C4.2 C5.2 C6.2 C8.2 C9.2 C10.1 C11.2 C21.1 C23.1 C25.1 C27.1 C28.1 H3.7 J1.1 J3.1 J5.1 R1.2 R8.2 R10.2 R12.2 R16.2 R17.2 R23.2 R26.2 R27.2 T1.2 U1.6 U1.11 U1.19 U1.28 U1.50 U1.75 U1.100 U2.8 U3.8 U4.2 U4.4 | length 454.3
  Top Layer w0.3: C21.1@43.199,81.945 44.353,81.945 44.742,82.334 U3.8@46.374,82.334 ; R17.2@46.009,85.49 46.009,83.95 46.374,83.585 U3.8@46.374,82.334 ; R16.2@50.946,72.266 50.946,71.012 ; v1(53.486,58.185) 50.946,60.725 50.946,71.012 ; v1(70.758,75.965) 71.393,75.33 C5.2@71.393,74.452 ; C9.2@75.584,70.631 v1(76.854,70.631) ; U3.8@46.374,82.334 46.374,80.029 44.977,78.632 44.977,72.282 46.247,71.012 50.946,71.012
  Top Layer w0.5: C23.1@43.083,4.464 43.834,4.464 44.556,5.186 J3.1@44.556,6.877 R23.2@44.556,9.52 ; v1(61.106,29.102) C28.1@77.588,29.102 ; R12.2@70.234,63.646 73.425,63.646 74.452,64.673 C8.2@74.452,66.313 74.452,67.191 74.314,67.329 v1(74.314,68.345) ; C6.2@76.335,66.313 76.798,66.776 v1(76.798,68.274) ; C11.2@82.442,82.326 C10.1@82.442,84.601 ; R8.2@107.08,68.869 109.62,68.869 ; R10.2@109.62,69.885 109.62,68.869 ; C1.2@111.668,51.173 R1.2@111.668,53.359 111.668,54.772 112.541,55.645 112.541,56.407 113.618,57.484 T1.2@113.691,57.484 ; C25.1@119.288,79.802 119.288,82.331 R27.2@122.066,82.331 R26.2@124.733,82.331 ; J1.1@135.539,84.209 C2.2@138.703,84.209 ; J5.1@135.655,53.613 121.431,53.613 117.56,57.484 T1.2@113.691,57.484 ; 109.62,68.869 110.239,68.869 111.017,68.091 U2.8@113.189,68.091 113.189,66.173 113.684,65.678 C4.2@114.689,65.678 114.689,62.238 113.691,61.24 T1.2@113.691,57.484
  Top Layer w0.75: C5.2@71.393,74.452 73.16,74.452 74.06,73.552 74.06,72.79 75.457,71.393 75.457,68.218 ; v1@74.441,68.218 75.457,68.218 ; v1@76.742,68.218 75.457,68.218 ; v1(76.798,68.274) 91.276,68.274 94.507,65.043 94.507,39.389
  Top Layer w1: C28.1@77.743,28.947 82.033,28.947 83.183,30.097 U4.4@86.887,30.097 ; U4.2@86.887,24.297 U4.4@86.887,30.097 ; v1(92.75,30.097) v1(91.057,30.097) U4.4@86.887,30.097
  Bottom Layer w0.3: 52.724,29.483 52.724,55.518 53.486,56.28 v1(53.486,58.185) ; U1.28@65.748,65.758 66.901,65.758 67.202,66.059 67.202,68.472 67.71,68.98 69.869,68.98 70.298,68.551 U1.19@70.298,63.208 ; U1.50@65.748,76.758 68.695,76.758 69.488,75.965 v1(70.758,75.965) ; 70.377,68.345 v1(74.314,68.345) 74.298,68.329 U1.11@74.298,63.208 ; U1.6@76.798,63.208 76.798,65.932 ; v1(76.798,68.274) 76.798,65.932 ; v1(76.854,70.631) 76.854,72.663 79.298,75.107 U1.75@79.298,78.308 81.737,78.308 83.712,80.283 85.49,80.283 86.379,81.172 86.379,83.839 85.617,84.601 C10.1@82.442,84.601 ; U1.100@80.848,64.758 79.298,64.758 78.124,65.932 76.798,65.932
  Bottom Layer w0.5: J3.1@44.556,6.877 46.374,6.877 47.009,7.512 47.009,14.243 52.724,19.958 52.724,29.483 ; 52.724,29.102 v1(61.106,29.102)
  Bottom Layer w0.75: H3.7@119.145,82.188 132.607,82.188 ; J1.1@135.528,84.22 133.496,82.188 132.607,82.188 ; J5.1@135.655,53.613 132.607,53.613 132.607,82.188
  Bottom Layer w1: v1(91.057,30.097) v1(92.75,30.097) 131.062,30.097 132.734,31.769 132.734,53.486
+5V: C13.1 C18.1 C19.1 C22.1 C24.1 C26.1 H1.1 H2.3 H2.37 HA1.1 IC1.8 J2.1 J4.1 J6.3 R22.1 R28.2 R43.2 U4.3 | length 531.5
  Top Layer w0.5: R43.2@28.197,63.265 28.197,64.424 27.578,65.043 IC1.8@27.578,65.495 31.698,65.495 32.912,64.281 32.912,56.28 34.69,54.502 49.676,54.502 51.708,52.47 v1(51.708,3.575) ; R28.2@46.993,108.985 48.41,108.985 R22.1@50.057,108.985 ; v1(79.902,37.23) 79.902,40.913 81.172,42.183 90.951,42.183 91.713,42.945 C13.1@91.713,47.39 ; 89.819,1.935 C24.1@89.819,3.956 90.824,3.956 91.292,4.424 J4.1@91.292,6.877 ; 99.598,1.924 C22.1@99.598,4.337 100.476,4.337 101.071,4.932 J2.1@101.071,6.877 ; C19.1@132.353,30.107 133.507,30.107 133.75,29.864 H1.1@135.401,29.864
  Top Layer w0.75: v1(48.406,118.002) 48.406,108.989 48.41,108.985 H2.37@48.41,103.27 ; C26.1@87.533,20.466 88.411,20.466 89.187,21.242 U4.3@89.187,24.297 ; H2.3@91.59,103.27 91.713,103.393 91.713,106.456 C18.1@92.083,106.826
  Top Layer w1: v1(72.79,3.829) v1(74.568,3.829) 82.823,3.829 84.728,1.924 122.828,1.924 135.401,14.497 H1.1@135.401,29.864 137.687,29.864 138.703,30.88 138.703,78.886 v1(137.814,79.775) v1(137.814,81.299) ; U4.3@89.187,24.297 101.852,24.297 103.778,22.371 103.778,1.924
  Bottom Layer w0.5: v1(51.708,3.575) 68.599,3.575 ; v1(79.902,37.23) 82.315,34.817 82.315,26.435 84.474,24.276 v1(93.618,24.276)
  Bottom Layer w0.75: H2.3@91.59,103.27 91.59,118.006
  Bottom Layer w1: HA1.1@27.822,111.017 27.822,115.706 30.245,118.129 122.701,118.129 137.814,103.016 v1(137.814,81.299) v1(137.814,79.775) ; 68.472,3.829 v1(72.79,3.829) v1(74.568,3.829) ; 68.472,3.956 J6.3@68.472,5.861
+5V2: C29.1 C36.1 C37.1 P3.1 R35.2 R42.2 R44.2 T4.3 U5.1 U8.3 | length 137.4
  Top Layer w0.5: P3.1@20.212,43.326 20.212,38.754 22.244,36.722 v1(26.054,36.722) ; R35.2@31.118,75.838 C29.1@33.155,75.838 ; 32.314,75.875 U5.1@32.314,78.632 ; C29.1@33.023,75.706 R42.2@33.023,71.139 33.023,69.726 31.896,68.599 22.625,68.599 20.974,66.948 20.974,60.852 22.244,59.582 27.578,59.582 30.245,56.915 30.245,53.994 32.15,52.089 47.771,52.089 49.676,50.184 49.676,42.818 48.549,41.691 R44.2@47.39,41.691 43.691,41.691 42.834,42.548 T4.3@42.834,44.596 ; C37.1@47.136,31.36 C37.1@47.39,31.614
  Top Layer w0.75: C37.1@47.39,31.614 R44.2@47.39,41.691
  Top Layer w1: U8.3@36.468,31.388 C37.1@46.854,31.388
  Bottom Layer w0.5: v1(26.054,36.722) 41.774,36.722 C37.1@47.136,31.36
+12V2: C34.1 C35.1 U6.8 U7.2 U8.1 U9.4 | length 77.2
  Top Layer w0.5: U6.8@19.564,74.441 19.564,75.825 v1(19.577,75.838) ; U9.4@23.882,51.2 v1(26.181,51.2)
  Top Layer w1: U7.2@19.069,26.308 C35.1@27.296,26.308 ; 24.276,26.435 C34.1@24.276,27.694 ; C35.1@27.578,26.336 U8.1@36.186,26.336
  Bottom Layer w0.5: v1(19.577,75.838) 19.577,60.725 26.181,54.121 v1(26.181,51.2) 26.181,46.12 27.705,44.596 27.705,40.786 24.276,37.357 24.276,29.892 C35.1@27.578,26.59
+24V2: C33.1 C38.1 J6.1 J7.1 J8.1 U7.1 | length 163
  Top Layer w1: J7.1@3.319,78.124 2.051,78.124 1.416,77.489 1.416,43.199 ; J8.1@3.324,42.945 1.67,42.945 1.416,43.199 ; C33.1@9.417,29.875 9.417,31.348 ; U7.1@19.029,31.348 9.417,31.348 ; J6.1@71.012,5.861 71.012,2.305 70.25,1.543 15.259,1.543 4.718,12.084 4.718,29.443 C38.1@6.623,31.348 ; 1.416,43.199 1.416,33.039 3.107,31.348 C38.1@6.623,31.348 ; C38.1@6.623,31.348 9.417,31.348
GND: C2.1 C3.1 C4.1 C5.1 C6.1 C7.1 C8.1 C9.1 C10.4 C11.1 C12.1 C13.5 C14.1 C15.1 C16.1 C17.1 C18.2 C19.2 C20.1 C21.2 C22.2 C23.2 C24.2 C25.2 C26.2 C27.2 C28.2 D3.2 DA1.2 H1.2 H2.1 H3.2 IC1.5 J1.3 J2.3 J3.3 J4.3 J5.4 J6.8 R6.2 R7.1 R9.1 R20.1 SB1.1 SB2.1 T2.2 T3.2 U1.10 U1.20 U1.27 U1.74 U1.99 U2.1 U2.2 U2.3 U2.4 U2.7 U3.4 U4.1 | length 156.2
  Top Layer w0.5: T3.2@21.162,105.549 24.396,105.549 26.882,108.035 T2.2@40.779,108.035 ; IC1.5@23.768,65.495 23.768,61.868 25.165,60.471 v1(31.134,60.471) ; J3.3@39.556,6.877 39.556,5.186 40.278,4.464 C23.2@41.283,4.464 ; J4.3@86.292,6.877 86.292,4.551 86.887,3.956 C24.2@88.019,3.956 ; J2.3@96.071,6.877 96.071,5.186 96.92,4.337 C22.2@97.798,4.337 ; C3.1@103.408,43.834 104.032,43.834 104.631,43.235 SB2.1@104.631,41.727 ; SB2.1@104.631,48.227 106.266,48.227 107.35,49.311 107.35,49.93 ; R7.1@107.35,56.534 107.35,49.93 ; U2.7@113.189,69.361 U2.2@117.989,69.361 ; SB1.1@114.791,48.1 112.961,49.93 107.35,49.93 ; C4.1@116.489,65.678 117.494,65.678 117.989,66.173 U2.1@117.989,68.091 U2.2@117.989,69.361 ; U2.4@117.989,71.901 U2.3@117.989,70.631 U2.2@117.989,69.361 ; D3.2@121.685,32.051 123.618,32.051 124.352,32.785 C20.1@124.352,33.663 128.427,33.663 129.686,32.404 H1.2@135.401,32.404
  Top Layer w0.75: C7.1@66.186,66.048 65.286,66.048 64.905,65.667 C12.1@64.905,63.646 64.905,62.006 65.551,61.36 77.235,61.36 78.135,62.26 C6.1@78.135,66.313 ; C17.1@69.107,71.636 70.377,71.636 C5.1@71.393,72.652 72.42,72.652 73.287,71.785 C9.1@73.287,70.758 73.287,69.096 72.652,68.461 C8.1@72.652,66.313 ; C18.2@94.01,106.572 94.13,106.452 H2.1@94.13,103.27 ; J1.3@135.528,89.3 137.687,89.3 138.703,88.284 C2.1@138.703,86.009
  Bottom Layer w0.3: 64.066,65.258 U1.27@65.748,65.258 ; v1@69.798,60.908 U1.20@69.798,63.208 ; 74.568,61.741 74.798,61.971 U1.10@74.798,63.208 74.798,64.384 75.076,64.662 ; U1.74@78.798,78.308 78.798,79.863 ; 79.394,65.678 79.814,65.258 U1.99@80.848,65.258
  Bottom Layer w0.5: R9.1@49.819,68.98 49.819,69.885 50.454,70.52 56.772,70.52 57.296,69.996 R6.2@58.185,69.996
  other v1: 128.924,2.94 106.699,3.956 117.875,3.956 80.029,6.75 137.56,11.576 94.253,12.211 80.283,13.227 100.857,15.767 60.217,17.799 137.56,18.434 77.743,19.069 92.094,21.101 99.841,21.101 60.344,25.165 137.433,26.435 99.841,26.816 107.461,26.816 117.24,26.816 127.527,26.943 59.582,35.452 74.822,35.706 44.723,57.296 54.121,60.598 35.325,60.725 69.615,60.725 81.426,61.995 48.406,62.249 52.343,63.9 47.263,69.107 71.012,69.996 40.024,74.695 74.314,75.965 80.791,80.156 106.191,82.188 60.471,84.22 64.535,84.22 53.994,87.776 76.981,89.173 70.758,92.475 67.71,92.602 4.464,95.523 14.37,95.523 27.07,95.65 54.248,96.158 132.861,97.428 109.62,97.682 40.405,100.349 27.07,102 40.405,106.318 88.411,106.953 4.337,108.223 56.28,108.35 66.186,108.35 103.143,110.382 118.637,110.89 89.427,115.843 13.862,117.494